# EAGLE board emonDCduo-ESP v1.2 (EAGLE 8.3.2)
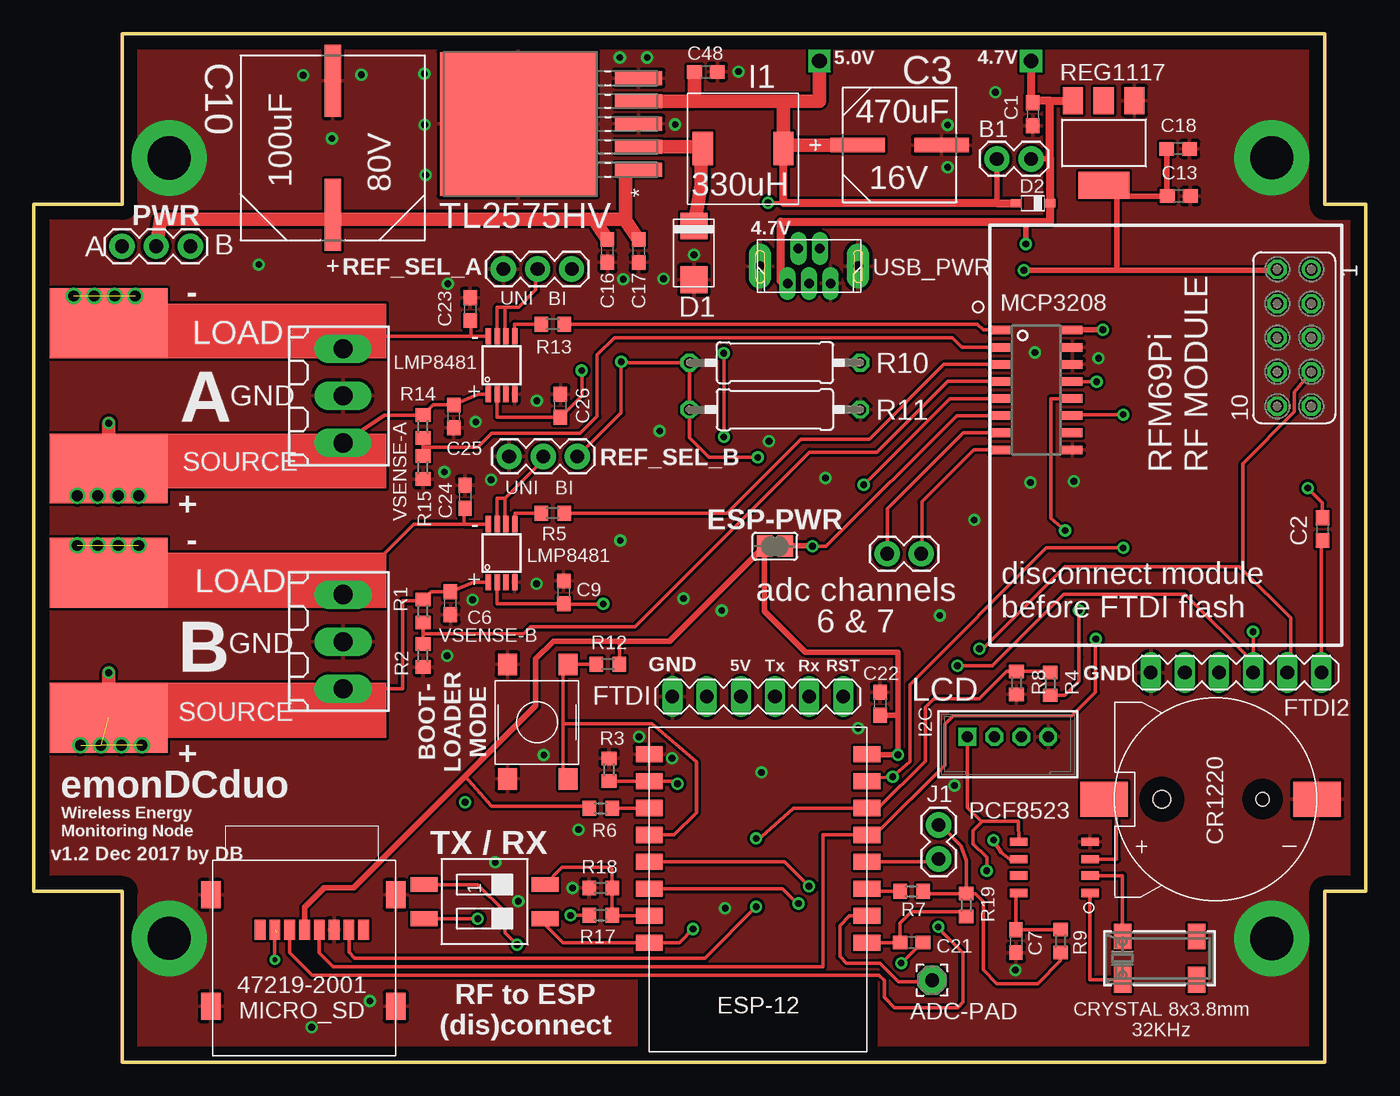
[diagram p0: board, top side]
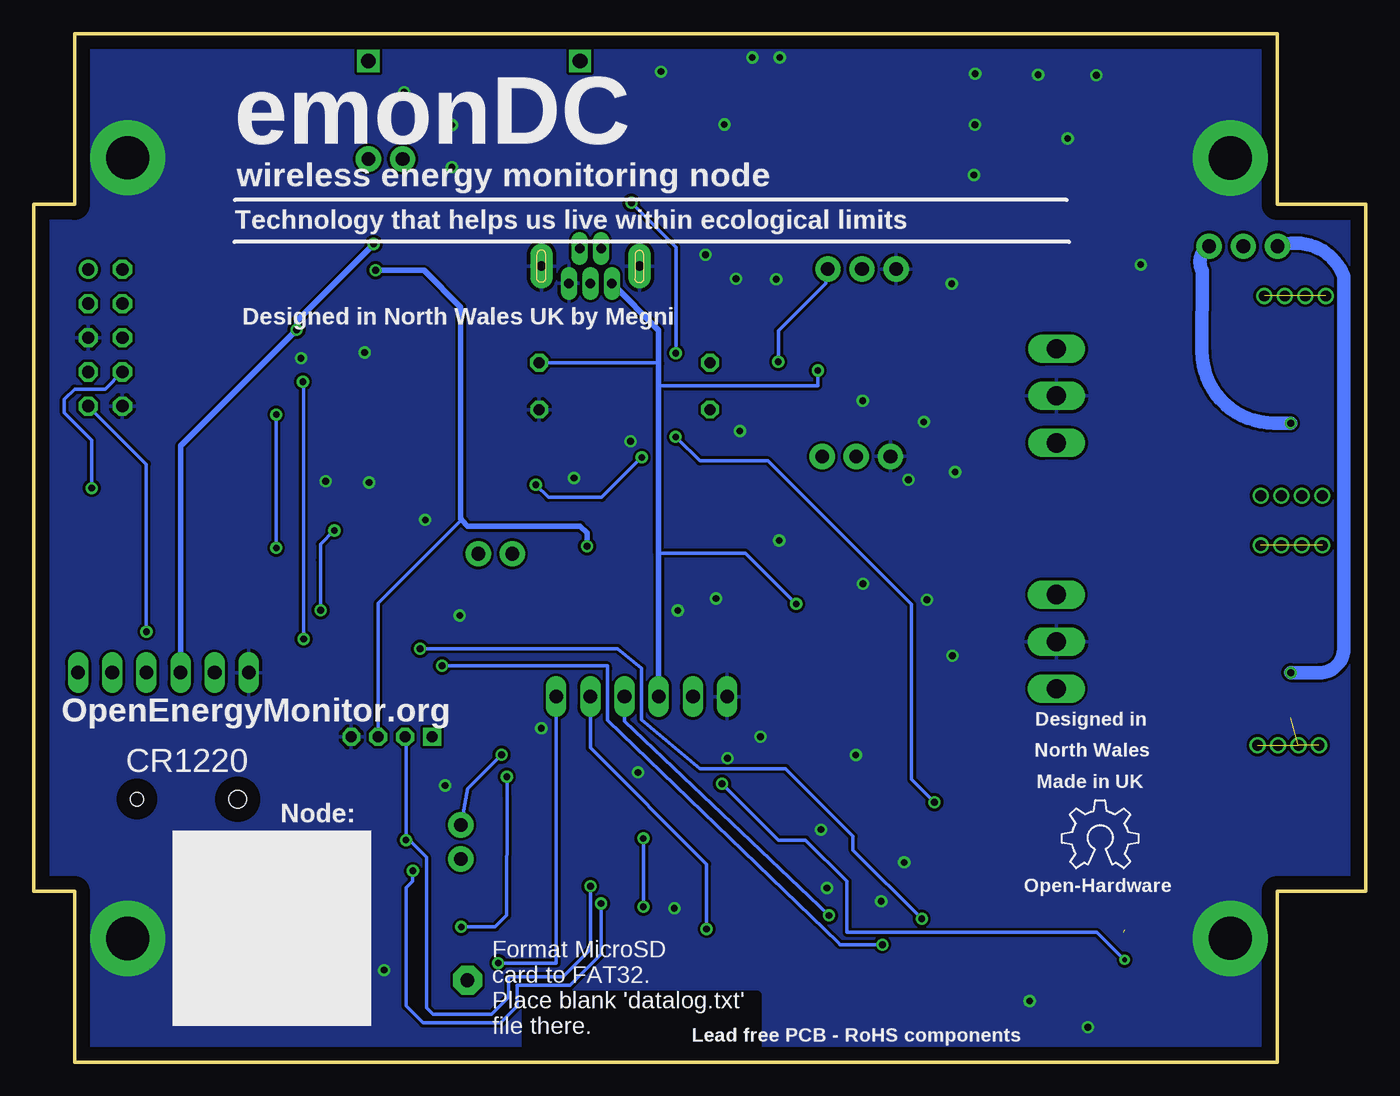
[diagram p1: board, bottom side, seen from below]

Size 99.06 x 76.45 mm. Coordinates in mm from the lower left corner, seen from the top.
Outline: 6.6,63.75 6.6,76.45 96.01,76.45 96.01,63.75 99.06,63.75 99.06,12.7 96.01,12.7 96.01,0 6.6,0 6.6,12.7 0,12.7 0,63.75 6.6,63.75
Copper layers (1*16): Top 0.035mm / dielectric 1.5mm / Bottom 0.035mm
Design rules "default *": minimum track width 10mil, minimum drill 19mil, track to track 8mil, track to pad 8mil, pad to pad 8mil, via to via 8mil, smd to smd 8mil, copper to edge 40mil, drill to drill 8mil, minimum pad ring 10mil, minimum via ring 8mil, stop-mask expansion 4mil, vias tented up to drill 0mil, thermal gap 10mil
Net classes: 2 thin_power: width 0.254 mm
tRestrict: area 45.2,1 to 62.5,6.1
bRestrict: area 45.2,1 to 62.5,5.1

## Footprints (pad centres in the part's own frame; a part is rotated, then mirrored left to right if it is on the bottom)
2,15/1,0 = drill 1.016 pad 2.159 octagon: 1 0,0
1X02 = drill 1.016 pad 1.88: 1 0,0; 2 2.54,0
C0603 = smd 1.1 x 1: 1 -0.85,0; 2 0.85,0
CAPAE830X1050N = smd 4.064 x 1.092: 1 -3.124,0; 2 3.124,0
CAPAE1350X1400N = smd 5.359 x 1.194: 1 -4.978,0; 2 4.978,0
CR1220SMD = smd 3.54 x 2.6: P+ 8.3,0; P- -7.55,0 | hole 1: -3.5,0 | hole 1.3: 4,0
DO-214 = smd 2 x 2: P$1 -2,0; P$2 2,0
SOD323_ST = smd 0.8 x 0.6: A 1.25,0; C -1.25,0
ESP8266-ESP12 = smd 2 x 1.2: 1 16.2,2; 2 16.2,4; 3 16.2,6; 4 16.2,8; 5 16.2,10; 6 16.2,12; 7 16.2,14; 8 16.2,16; 9 0,16; 10 0,14; 11 0,12; 12 0,10; 13 0,8; 14 0,6; 15 0,4; 16 0,2
SJ = smd 1.168 x 1.6: 1 -0.762,0; 2 0.762,0
MA06-1 = drill 1.016 long: 1 0,0; 2 2.54,0; 3 5.08,0; 4 7.62,0; 5 10.16,0; 6 12.7,0
FE05-2 = drill 0.914: 1 -5.08,1.27 | drill 0.914 octagon: 2 -5.08,-1.27; 3 -2.54,1.27; 4 -2.54,-1.27; 5 0,1.27; 6 0,-1.27; 7 2.54,1.27; 8 2.54,-1.27; 9 5.08,1.27; 10 5.08,-1.27
SRR0603-331KL = smd 1.5 x 2.5: P$1 -3,0; P$2 3,0
SWITCH_TACT_MULTICOMP = smd 1.6 x 1.4: P$1 -1.1,5.3; P$2 7.4,5.3; P$3 -1.1,0.8; P$4 7.4,0.8
SOIC16 = smd 0.635 x 1.524: 1 -4.445,-2.695; 2 -3.175,-2.695; 3 -1.905,-2.695; 4 -0.635,-2.695; 5 0.635,-2.695; 6 1.905,-2.695; 7 3.175,-2.695; 8 4.445,-2.695; 9 4.445,2.695; 10 3.175,2.695; 11 1.905,2.695; 12 0.635,2.695; 13 -0.635,2.695; 14 -1.905,2.695; 15 -3.175,2.695; 16 -4.445,2.695
5000751517_SD = drill 0.7 pad 1.016 long: D+ 0,-1.3; D- -0.8,1.3; GND1 1.6,-1.3; ID 0.8,1.3; VBUS -1.6,-1.3 | drill 0.7 pad 1.676 long: GND2 3.65,0; GND3 -3.65,0
B4B-PH-K = drill 0.813 square: 1 -3,0 | drill 0.813 octagon: 2 -1,0; 3 1,0; 4 3,0
SOIC_8 = smd 1.3 x 0.6: 1 -2.6,1.9; 2 -2.6,0.6; 3 -2.6,-0.6; 4 -2.6,-1.9; 5 2.7,-1.9; 6 2.7,-0.6; 7 2.7,0.6; 8 2.7,1.9
1X03 = drill 1.016 pad 1.88: 1 0,0; 2 2.54,0; 3 5.08,0
R0603 = smd 1 x 1.1: 1 -0.85,0; 2 0.85,0
0309/12 = drill 0.813 octagon: 1 -6.35,0; 2 6.35,0
SOT223 = smd 1.499 x 2.007: 1 -2.261,-3.15; 2 0.025,-3.15; 3 2.311,-3.15 | smd 3.81 x 2.007: 4 0,3.15
SMS-002 = smd 1.092 x 2.007: 1 -1.27,-4.496; 2 1.27,-4.496; 3 1.27,4.496; 4 -1.27,4.496
180-3 = drill 1.422 long: 1 -3.5,0; 2 0,0; 3 3.5,0
S-PDSO-G08 = smd 0.4 x 1.2: 1 -0.975,-2.157; 2 -0.325,-2.157; 3 0.325,-2.157; 4 0.975,-2.157; 5 0.975,2.157; 6 0.325,2.157; 7 -0.325,2.157; 8 -0.975,2.157
TO-263 = smd 1.041 x 3.505: 1 -3.404,-8.788; 2 -1.702,-8.788; 3 0,-8.788; 4 1.702,-8.788; 5 3.404,-8.788 | smd 10.668 x 11.659: 6 0,0.152
EBW_SERIES_15.2MM = smd 5.2 x 8.75: P$1 -5.4,0; P$2 5.4,0
47219-2001_MICROSD = smd 1.45 x 2: P$1 0,0; P$2 13.75,0; P$3 0,8.3; P$4 13.75,8.3 | smd 0.8 x 1.5: PIN1 10.08,2.6; PIN2 8.98,2.6; PIN3 7.88,2.6; PIN4 6.78,2.6; PIN5 5.68,2.6; PIN6 4.58,2.6; PIN7 3.48,2.6; PIN8 2.38,2.6
CRYSTAL_8X3.8 = smd 1.3 x 1.9: P$1 -2.75,-1.6; P$2 2.75,-1.6; P$3 2.75,1.6; P$4 -2.75,1.6

## Placement (x,y rotation side)
ADC-PAD  [2,15/1,0]  66.8,6.1 0 top
B1  [1X02]  71.63,67.14 0 top
C1  10uF TANT  [C0603]  74.3,70.46 270 top
C2  100nF  [C0603]  95.83,39.63 270 top
C3  470uF 16V  [CAPAE830X1050N]  64.39,68.17 0 top
C6  0.1uF 100V  [C0603]  30.99,34.11 270 top
C7  10uF  [C0603]  73.04,9 270 top
C9  100nF  [C0603]  39.42,34.93 90 top
C10  100uF 80V  [CAPAE1350X1400N]  22.25,67.96 90 top
C13  100nF  [C0603]  85.15,64.38 0 top
C16  0.1uF 100V  [C0603]  42.66,60.3 270 top
C17  0.1uF 100V  [C0603]  44.99,60.3 270 top
C18  10uF TANT  [C0603]  85.1,67.89 0 top
C21  100nF  [C0603]  65.28,8.89 0 top
C22  100nF  [C0603]  62.94,26.64 270 top
C23  0.1uF 100V  [C0603]  32.46,55.98 270 top
C24  0.1uF 100V  [C0603]  32.08,42.04 270 top
C25  0.1uF 100V  [C0603]  31.24,48.01 270 top
C26  100nF  [C0603]  39.17,48.8 90 top
C48  100nF  [C0603]  49.99,73.61 0 top
CR1220  CR1220SMD  [CR1220SMD]  87.88,19.56 180 top
D1  MBRA130LT3G  [DO-214]  49.09,60.16 270 top
D2  BAT60AE6327HTSA1  [SOD323_ST]  74.31,63.85 180 top
ESP-12  ESP8266_ESP-12  [ESP8266-ESP12]  61.98,24.89 180 top
ESP-PWR  [SJ]  55.12,38.35 0 top
FTDI1  FTDI  [MA06-1]  60.2,27.18 180 top
FTDI2  FTDI  [MA06-1]  95.76,28.96 180 top
GPIO_1  [FE05-2]  93.73,53.85 270 top
I1  330uH  [SRR0603-331KL]  52.76,67.91 0 top
IO1  [1X02]  67.29,15.1 90 top
J5  455-1750-1-ND  [1X02]  66,37.79 180 top
LOGO1  OSHW_LOGO_6MILX0200-NT  [OSHW_6X200_NOTEXT]  22.6,14.4 0 bottom
MC2  MC32882  [SWITCH_TACT_MULTICOMP]  40.53,22.17 90 top
MCP3208  MCP3208-BI/SL  [SOIC16]  74.54,49.96 270 top
MINI_USB-B  5000751517_SD  [5000751517_SD]  57.66,59.18 0 top
P1  B4B-PH-K  [B4B-PH-K]  72.44,24.18 0 top
PCF8523  PCF8523_RTC  [SOIC_8]  75.95,14.48 180 top
PWR  455-1750-1-ND  [1X03]  6.57,60.64 0 top
R1  100K 75V  [R0603]  28.96,33.53 90 top
R2  5.6K  [R0603]  28.96,30.23 90 top
R3  10K  [R0603]  42.79,21.74 90 top
R4  1K  [R0603]  75.57,28.13 270 top
R5  1K  [R0603]  38.6,40.81 0 top
R6  10K  [R0603]  42.16,18.87 180 top
R7  10K  [R0603]  65.28,12.7 0 top
R8  2K  [R0603]  73.08,28.19 90 top
R9  1K  [R0603]  76.36,9.01 270 top
R10  10K  [0309/12]  55.12,52 0 top
R11  3.16K  [0309/12]  55.12,48.51 180 top
R12  10K  [R0603]  42.7,29.59 0 top
R13  1K  [R0603]  38.61,54.86 0 top
R14  100K 75V  [R0603]  28.96,47.24 90 top
R15  5.6K  [R0603]  28.96,44.2 90 top
R17  5.6K  [R0603]  42.16,10.92 0 top
R18  10K  [R0603]  42.16,12.95 180 top
R19  10K  [R0603]  69.34,11.68 90 top
REF_SEL_A  455-1750-1-ND  [1X03]  34.92,58.95 0 top
REF_SEL_B  455-1750-1-ND  [1X03]  35.35,45.03 0 top
REG1117  REG1117-3.3V  [SOT223]  79.58,68.33 180 top
S1  SWS002  [SMS-002]  33.53,11.94 270 top
SCREW1  [180-3]  23,49.53 270 top
SCREW2  [180-3]  23.01,31.26 270 top
SHUNTMON-A  LMP8481  [S-PDSO-G08]  34.8,51.82 0 top
SHUNTMON-B  LMP8481  [S-PDSO-G08]  34.8,37.85 0 top
TL2575HV  TL2575HV-5V  [TO-263]  36.19,69.74 90 top
U$1  EBW_SERIES_15.2MM  [EBW_SERIES_15.2MM]  5.59,30.99 90 top
U$3  EBW_SERIES_15.2MM  [EBW_SERIES_15.2MM]  5.59,49.53 90 top
U$4  47219-2001_MICROSD  [47219-2001_MICROSD]  26.92,12.45 180 top
Y1  32Khz  [CRYSTAL_8X3.8]  83.71,7.73 0 top

## Library data of the parts
ADC-PAD = wirepad
B1 IO1 = SparkFun
C1 C18 = rcl; PARTNO: TMCJ0J106MTRF
C2 C7 C13 C16 C17 C21 C22 C48 R3 R5-R7 R9-R13 R17-R19 = rcl
C3 = Panasonic-EEEFK_EEEFP; MPN: EEE-FK1C471P; OC_FARNELL: 9695710; OC_NEWARK: 96K9385; PACKAGE: CASE-F; SUPPLIER: PANASONIC; TOLERANCE: ±20 %; VOLTAGERATING: 16V
C6 C9 C23-C26 = rcl; MPN: C1608X7S2A104K080AB
C10 = Panasonic-EEE-EEV-EEF-ECQ; MPN: EEVFK1K101Q; OC_FARNELL: 9696113; OC_NEWARK: 96K9484; SUPPLIER: PANASONIC; TOLERANCE: ±20 %; VOLTAGERATING: 80V
CR1220 PCF8523 = IotaWatt_parts
D1 = CASE 403D Diode; MF: ON SEMICONDUCTOR; MPN: MBRA130LT3G; OC_FARNELL: 9555978
D2 = diode; MPN: BAT60AE6327HTSA1
ESP-12 = ESP8266-ESP12
ESP-PWR = jumper
FTDI1 FTDI2 = JeeLabs
GPIO_1 = con-lsta; OC_FARNELL: unknown; OC_NEWARK: unknown
I1 = SRR0603-331KL; INDUCTANCE: 330uH; MF: BOURNS; MPN: SRR0603-331KL; OC_FARNELL: 2333890
J5 = SparkFun-Connectors
LOGO1 = ohw-logo; OC_FARNELL: unknown
MC2 = multicomp tact switch
MCP3208 = MCP3208
MINI_USB-B = 5000751517_sd
P1 = jst-ph
PWR = SparkFun-Connectors; PROD_ID: XXX-00000
R1 R14 = rcl; MPN: MCWR06X1003FTL
R2 R4 R8 R15 = rcl; MPN: MCWR06X5901FTL
REF_SEL_A REF_SEL_B = SparkFun-Connectors; MF: MULTICOMP; MPN: 2212S-02SG-85; OC_FARNELL: 1593458; PROD_ID: XXX-00000
REG1117 = burr-brown; MF: TEXAS INSTRUMENTS; MPN: REG1117; OC_FARNELL: 1097566; OC_NEWARK: 14P6981
S1 = smd-special
SCREW1 SCREW2 = con-weidmueller-sl35; OC_FARNELL: unknown; OC_NEWARK: unknown
SHUNTMON-A = lmp8481b; MF: TEXAS INSTRUMENTS; MPN: LMP8481MME-S/NOPB; OC_FARNELL: 2322044
SHUNTMON-B = lmp8481b; DIGIKEY_PART: 296-37196-1-ND; MF: TEXAS INSTRUMENTS; MPN: LMP8481MME-H/NOPB; OC_FARNELL: 2322044
TL2575HV = TL2575HV; MF: TEXAS INSTRUMENTS; MPN: LM2575HVS-15/NOPB; OC_FARNELL: 2492609
U$1 U$3 = EBW series shunt
U$4 = MOLEX 47219-2001
Y1 = microbuilder

## Nets
3.3V: C13.1 C18.1 ESP-PWR.2 GPIO_1.2 MCP3208.6 P1.3 REG1117.2 REG1117.4
3.3V-ESP: C22.2 ESP-12.16 ESP-PWR.1 IO1.2 R6.2 R7.2 R9.2 R12.2 R19.2 U$4.PIN4
4.7V [power]: B1.2 C1.1 C9.1 C26.1 D2.C FTDI1.4 FTDI2.4 MCP3208.16 MINI_USB-B.VBUS R10.2 REG1117.3 SHUNTMON-A.2 SHUNTMON-B.2
+5V: B1.1 C3.1 C48.1 D2.A I1.P$2 TL2575HV.4
_RESET: C2.1 GPIO_1.8
ADC: ADC-PAD.1 ESP-12.10
ADCSHUNT-A: MCP3208.1 R13.2
ADCSHUNT-B: MCP3208.3 R5.2
CH6: J5.2 MCP3208.7
CH7: J5.1 MCP3208.8
CH_PD: ESP-12.11 R7.1
D0/RX: FTDI2.2 GPIO_1.7 S1.2
D1/TX: FTDI2.3 GPIO_1.9 S1.1
ESPRX: ESP-12.7 R17.2 R18.1 S1.4
ESPTX: ESP-12.8 FTDI1.2 S1.3
GND [thin_power]: C1.2 C3.2 C6.2 C7.2 C9.2 C10.2 C13.2 C16.2 C17.2 C18.2 C22.1 C23.1 C24.1 C25.2 C26.2 C48.2 CR1220.P- D1.P$2 ESP-12.1 FTDI1.6 FTDI2.6 GPIO_1.5 GPIO_1.10 MC2.P$1 MC2.P$2 MCP3208.9 MCP3208.14 MCP3208.15 MINI_USB-B.GND1 MINI_USB-B.GND2 MINI_USB-B.GND3 P1.4 PCF8523.4 R2.1 R3.2 R8.1 R11.1 R15.1 R18.2 REF_SEL_A.1 REF_SEL_B.1 REG1117.1 SCREW1.2 SCREW2.2 SHUNTMON-A.4 SHUNTMON-B.4 TL2575HV.3 TL2575HV.5 TL2575HV.6 U$4.P$1 U$4.P$2 U$4.P$3 U$4.P$4 U$4.PIN6
GPIO0: ESP-12.4 MC2.P$3 MC2.P$4 R12.1
GPIO2: ESP-12.3 R6.1
GPIO4: MCP3208.10
GPIO12: ESP-12.14 R4.1 R8.2 U$4.PIN7
GPIO12A: MCP3208.12 R4.2
GPIO13: ESP-12.15 MCP3208.11 U$4.PIN3
GPIO14: ESP-12.13 MCP3208.13 U$4.PIN5
GPIO15 [thin_power]: ESP-12.2 R3.1 U$4.PIN2
GPIO16: ESP-12.12 IO1.1
IND: D1.P$1 I1.P$1 TL2575HV.2
LOAD-NEG-A: C23.2 SCREW1.1 SHUNTMON-A.8 U$3.P$2
LOAD-NEG-B: C24.2 SCREW2.1 SHUNTMON-B.8 U$1.P$2
N$4: R13.1 SHUNTMON-A.5
N$6: R5.1 SHUNTMON-B.5
N$7: U$4.PIN1
N$10: C7.1 PCF8523.8 R9.1
N$20: FTDI2.5
N$30: C21.2 FTDI1.1
N$32: U$4.PIN8
N$36: FTDI1.3 R17.1
N$43: CR1220.P+ PCF8523.3
N$44: PCF8523.2 Y1.P$4
N$45: PCF8523.1 Y1.P$1
N$301: C2.2 FTDI2.1
PWR_IN: C10.1 C16.1 C17.1 PWR.2 TL2575HV.1
REF_A_INPUT: REF_SEL_A.2 SHUNTMON-A.6 SHUNTMON-A.7
REF_B_INPUT [thin_power]: REF_SEL_B.2 SHUNTMON-B.6 SHUNTMON-B.7
REF_INPUT: MCP3208.5 R10.1 R11.2 REF_SEL_A.3 REF_SEL_B.3
RESTESP: C21.1 ESP-12.9 R19.1
SCL: ESP-12.5 P1.2 PCF8523.6
SDA: ESP-12.6 P1.1 PCF8523.5
SOURCE-POS-A: C25.1 PWR.3 R14.2 SCREW1.3 SHUNTMON-A.1 U$3.P$1
SOURCE-POS-B: C6.1 PWR.1 R1.2 SCREW2.3 SHUNTMON-B.1 U$1.P$1
VSENSEA: MCP3208.2 R14.1 R15.2
VSENSEB: MCP3208.4 R1.1 R2.2

## Tracks (layer width: path | path; a pad name or v marks a point on that pad's centre or on a via)
3.3V  (via drill 0.5)
  Top 0.254: 55.94,38.39 ESP-PWR.2 | 92.46,58.86 GPIO_1.2 | MCP3208.6 68.63,48.06 58.93,38.35 v57.91,38.35
  Top 0.406: REG1117.2 79.54,71.48 | C18.1 84.25,64.44 C13.1 80.55,64.38 | 79.54,65.13 REG1117.4 79.58,64.38 80.55,64.38 | v57.91,38.35 57.88,38.39 55.94,38.39 | v73.63,58.86 80.55,58.86 | 80.55,58.86 92.46,58.86 | 80.55,58.86 80.55,64.38
  Bottom 0.254: P1.3 73.44,34.13 67.25,40.32
  Bottom 0.406: v73.63,58.86 70.04,58.86 67.31,56.13 67.31,40.39 67.25,40.32 66.78,39.85 58.42,39.85 57.91,39.34 v57.91,38.35
3.3V-ESP  (via drill 0.5)
  Top 0.254: R7.2 66.13,12.53 R19.2 | R6.2 40.89,19.04 34.05,19.04 32.09,21.25 | R19.2 69.34,14.99 68.96,16.11 67.42,17.64 IO1.2 | R19.2 70.02,12.53 70.61,11.94 70.61,6.86 71.63,5.84 74.68,5.84 76.36,7.53 R9.2 | R12.2 43.55,31.28 43.75,31.28
  Top 0.406: 64.26,25.91 64.26,30.48 57.4,30.48 54.36,33.53 ESP-PWR.1 47.29,31.28 43.75,31.28 38.65,31.28 37.34,29.97 37.34,26.49 32.09,21.25 23.8,12.95 21.59,12.95 20.14,11.51 U$4.PIN4 | 64.26,25.91 v64.26,22.86 62.01,22.86 ESP-12.16 | C22.2 64.15,25.8 64.26,25.91
  Bottom 0.254: v64.26,22.86 66.8,20.32 IO1.2
4.7V  (via drill 0.5, 1.1)
  Top 0.254: SHUNTMON-A.2 34.47,47.95 C26.1 40.76,49.54 40.76,51.36 40.75,51.36 v40.75,51.41 | SHUNTMON-B.2 34.47,34.08 C9.1 39.46,34.04 42.42,34.04 42.39,34.07 v42.36,34.07
  Top 0.406: D2.C 75.74,64.1 | 74.17,71.31 C1.1 74.3,71.48 | 75.56,62.48 73.79,62.48 v73.79,60.81 | v79.5,54.44 77.27,54.44 MCP3208.16 | MINI_USB-B.VBUS 55.86,58.08 55.56,58.08 | B1.2 75.4,67.14 75.56,67.31
  Top 0.61: v74.17,74.42 74.17,71.31 | 75.56,71.48 75.56,67.31 D2.C 75.56,62.48 55.56,62.48 55.56,58.08 | 75.56,71.48 REG1117.3 | 75.56,71.48 74.3,71.48
  Bottom 0.254: 40.85,51.31 v40.75,51.41 40.75,50.29 52.58,50.29 52.58,51.94 52.58,52 R10.2 | v42.36,34.07 46.14,37.85 52.58,37.85
  Bottom 0.406: FTDI1.4 52.58,37.85 52.58,51.94 52.58,54.4 MINI_USB-B.VBUS | FTDI2.4 88.14,45.81 v79.5,54.44 79.5,55.09 v73.79,60.81
+5V  (via drill 0.5, 1.1)
  Top 0.254: v54.61,63.88 55.72,63.88 55.76,63.85 | 32.07,19.16 v32.08,19.33 | v51.32,46.48 51.32,52.69 v51.31,52.7
  Top 0.406: B1.1 71.63,63.85
  Top 0.61: D2.A 71.63,63.85 55.76,63.85 I1.P$2
  Top 1.016: TL2575HV.4 49.14,71.44 | 49.14,71.44 C48.1 | 55.76,71.44 I1.P$2 55.5,68.17 C3.1 | 55.76,71.44 49.14,71.44 | v58.42,74.42 58.42,71.44 55.76,71.44
  Bottom 0.254: v51.32,46.48 51.18,46.36 49.53,44.7 44.45,44.7 33.78,34.04 33.78,21.03 v32.08,19.33 | v51.31,52.7 51.31,60.58 v54.61,63.88
_RESET  (via drill 0.5)
  Top 0.254: C2.1 95.83,41.58 v94.74,42.67
  Bottom 0.254: v94.74,42.67 94.74,46.23 96.77,48.26 96.77,49.28 96.01,50.04 93.73,50.04 GPIO_1.8
ADC
  Top 0.254: ESP-12.10 60.68,10.89 59.94,10.16 59.94,7.87 60.45,7.37 62.93,7.37 64.3,5.99 66.7,5.99 ADC-PAD.1
ADCSHUNT-A
  Top 0.254: R13.2 70.18,54.86 70.6,54.44 71.81,54.44 MCP3208.1
ADCSHUNT-B
  Top 0.254: MCP3208.3 71.82,51.88 67.69,51.88 62.14,46.32 57.05,46.32 51.54,40.81 R5.2 39.43,40.83
CH6
  Top 0.254: MCP3208.7 69.14,46.79 63.5,41.15 63.5,37.39 J5.2
CH7
  Top 0.254: MCP3208.8 69.9,45.52 66.04,41.66 66.04,37.39 J5.1
CH_PD
  Top 0.254: ESP-12.11 61.98,12.7 R7.1
D0/RX  (via drill 0.5)
  Top 0.254: S1.2 v33.02,10.67 | v70.32,30.73 70.57,30.73 76.67,36.83 89.66,36.83 89.92,36.58 | 89.92,36.58 93.47,33.02 93.47,29.21 FTDI2.2 | GPIO_1.7 93.75,49.81 93.75,48.34 89.92,44.5 89.92,36.58
  Bottom 0.254: v33.02,10.67 38.13,15.77 38.13,16.79 43.16,21.82 49.52,21.82 53.86,25.46 53.86,29.29 55.63,30.73 v70.32,30.73
D1/TX  (via drill 0.5)
  Top 0.254: v90.68,32 FTDI2.3 90.68,29.72 85.6,34.8 76.62,34.8 71.28,29.46 v68.69,29.46 | v35.95,8.74 35.05,9.64 35.05,11.18 33.02,13.21 S1.1
  Bottom 0.254: v68.69,29.46 56.39,29.46 56.38,29.26 56.38,25.43 39.22,8.87 39.1,8.74 v35.95,8.74 | v90.68,32 90.68,44.45 GPIO_1.9
ESPRX
  Top 0.254: ESP-12.7 42.79,10.89 R17.2 R18.1 43.01,14.39 42.93,14.48 39.29,14.48 S1.4
ESPTX  (via drill 0.5)
  Top 0.254: S1.3 38.02,10.24 39.37,8.89 ESP-12.8 48.01,8.89 v49.02,9.91
  Bottom 0.254: v49.02,9.91 49.02,14.73 57.66,23.37 FTDI1.2
GND  (via drill 0.5, 3.2 pad 5.59)
  Top 0.254: ESP-12.1 46.06,22.61
  other vias: 10.08,67.21 92.07,67.23 52.4,73.63 10.08,9.2 92.07,9.2 32.65,34.38 16.74,59.28 30.55,43.87 37.41,49.17 71.51,72.1 32.87,47.6 37.39,35.57 47.47,22.6 51.42,11.44 43.84,58.2 67.97,66.53 47.7,69.7 29.07,69.69 20.04,73.36 24.38,73.4 30.74,30.22 34.01,43.3 20.66,2.6 49.09,60.02 45.02,24.2 61.31,24.82 30.81,57.87 37.93,22.83 25.01,4.55 46.83,58.24 67.97,69.67 29.14,65.95 29.06,73.48 43.59,74.69 45.62,74.69 22.18,68.66 43.63,38.79 48.33,34.47 51.17,33.58 67.38,33.2 54.12,21.54 74.11,43.09 79.18,52.33 74.44,52.76 77.35,43.18 54.68,46.15 72.99,6.85 46.55,46.91 58.88,43.42 40.08,12.95 40.52,17.29 36.04,11.96 34.32,14.85 69.94,40.31 68.47,20.57
  pour Bottom (isolate 0.127): 6.86,76.2 6.86,63.5 0.25,63.5 0.25,12.95 6.86,12.95 6.86,0.25 95.76,0.25 95.76,12.95 98.81,12.95 98.81,63.5 95.76,63.5 95.76,76.2
  pour Top (isolate 0.127): 6.86,76.2 6.86,63.5 0.25,63.5 0.25,12.95 6.86,12.95 6.86,0.25 95.76,0.25 95.76,12.95 98.81,12.95 98.81,63.5 95.76,63.5 95.76,76.2
GPIO0
  Top 0.254: ESP-12.4 47.63,16.89 49.28,18.54 49.28,22.35 45.97,25.15 39.37,25.15 | 39.37,25.15 39.37,29.21 39.73,29.21 MC2.P$4 R12.1 | 39.37,25.15 39.37,21.59 39.73,21.59 MC2.P$3
GPIO2
  Top 0.254: 42.93,18.78 R6.1 45.76,18.87 ESP-12.3
GPIO12  (via drill 0.5)
  Top 0.254: 53.78,16.45 56.48,18.89 ESP-12.14 61.98,18.86 62.77,18.86 66.29,22.38 66.29,26.37 66.95,27.02 70.33,27.02 72.35,29.04 R8.2 75.57,29.04 R4.1 | 53.78,16.45 53.59,16.51 | v53.72,11.56 49.91,7.75 23.88,7.75 23.44,8.18 U$4.PIN7 | v53.72,16.64 53.85,16.64 53.78,16.45
  Bottom 0.254: v53.72,16.64 v53.72,11.56
GPIO12A  (via drill 0.5)
  Top 0.254: 77.22,49.34 MCP3208.12 75.64,49.33 75.64,40.45 76.69,39.52 v76.7,39.52 | v77.72,33.59 77.72,30.14 77.72,30.13 77.72,28.32 76.68,27.28 R4.2
  Bottom 0.254: v76.7,39.52 77.72,38.5 77.72,37.34 v77.72,33.59
GPIO13  (via drill 0.48, 0.5)
  Top 0.254: ESP-12.15 61.98,21.08 v63.87,21.22 65.15,22.35 65.15,28.07 75.31,38.23 v81.03,38.23 | v81.03,48.13 77.72,48.13 MCP3208.11 | v67.26,10.06 67.26,9.95 69.09,8.13 69.09,4.45 68.71,4.06 64.01,4.06 63.25,4.83 63.25,6.1 62.87,6.48 20.7,6.48 19.04,8.13 U$4.PIN3
  Bottom 0.254: v63.87,21.22 63.87,19.81 63.88,10.92 64.75,10.06 v67.26,10.06 | v81.03,38.23 v81.03,48.13
GPIO14  (via drill 0.5)
  Top 0.254: ESP-12.13 58.67,16.89 58.67,7.11 22.26,7.11 21.24,8.13 U$4.PIN5 | ESP-12.13 | ESP-12.13 62.57,16.89 67.77,22.08 67.77,25.14 68.38,25.76 77.19,25.76 78.95,27.52 78.95,31.43 v78.98,31.46 | v79.04,50.58 77.26,50.58 MCP3208.13
  Bottom 0.254: v78.98,31.46 78.98,50.52 v79.04,50.58
GPIO15  (via drill 0.35, 0.5)  (1 unrouted)
  Top 0.254: ESP-12.2 R3.1 47.88,20.89 v47.88,20.7 | 18.03,9.65 18.09,9.65 | v17.94,7.62 U$4.PIN2
  Bottom 0.254: v47.88,20.7 43.69,16.51 41.66,16.51 38.58,13.44 38.58,9.65 20,9.65 17.95,7.6 v17.94,7.62
GPIO16
  Top 0.254: IO1.1 66.71,14.89 ESP-12.12
IND
  Top 1.016: TL2575HV.2 49.63,68.04 | 49.63,68.04 I1.P$1 | 49.63,68.04 49.63,65.1 D1.P$1
LOAD-NEG-A
  Top 0.254: 32.51,53.97 23.94,53.97 SCREW1.1 22.34,53.69 7.02,53.69 | 32.51,53.97 SHUNTMON-A.8 | C23.2 32.51,54.83 32.51,53.97
  Top 2.54: 7.02,53.69 U$3.P$2
LOAD-NEG-B
  Top 0.152: U$1.P$2 5.59,37.85 5.6,37.86 | 8.69,38.35 8.69,38.05 7.03,36.39 U$1.P$2 | U$1.P$2 5.59,37.59 5.39,37.79 | U$1.P$2 5.91,36.39 7.25,37.73
  Top 0.254: 32,40 28.25,40 SCREW2.1 21.38,36.39 U$1.P$2 | 32,40 SHUNTMON-B.8 | C24.2 32,41.11 32,40
N$4
  Top 0.254: SHUNTMON-A.5 35.77,54.86 R13.1
N$6
  Top 0.254: SHUNTMON-B.5 35.81,40.81 R5.1
N$10
  Top 0.254: R9.1 73.05,9.86 C7.1 73.04,12.53 PCF8523.8
N$30  (via drill 0.5)
  Top 0.254: v64.52,7.37 66.04,8.89 C21.2
  Bottom 0.254: FTDI1.1 60.2,7.37 v64.52,7.37
N$36  (via drill 0.5)
  Top 0.254: R17.1 v39.92,10.91
  Bottom 0.254: v39.92,10.91 55.12,25.36 FTDI1.3
N$43
  Top 0.254: PCF8523.3 80.52,15.08 80.52,19.3 79.58,19.3 CR1220.P+
N$44
  Top 0.254: PCF8523.2 80.96,13.88 Y1.P$4
N$45
  Top 0.254: PCF8523.1 78.55,6.13 Y1.P$1
N$301
  Top 0.254: FTDI2.1 95.76,38.35 95.83,38.43 C2.2
PWR_IN
  Top 1.016: 44.27,66.33 TL2575HV.1 44.01,66.33 44.01,62.66 43.94,62.66 | PWR.2 9.46,62.66 21.93,62.66 | 43.94,62.66 42.29,62.66 41.9,62.27 | C16.1 41.9,62.27 | C17.1 43.97,62.63 43.94,62.66 | 21.93,62.66 C10.1 | 41.9,62.27 41.9,62.66 21.93,62.66
REF_A_INPUT
  Top 0.254: 35.05,56.13 35.05,54.04 SHUNTMON-A.6 | SHUNTMON-A.7 34.47,56.13 35.05,56.13 | 35.05,56.13 36.07,56.13 37.34,57.4 37.34,58.83 REF_SEL_A.2
REF_B_INPUT
  Top 0.254: REF_SEL_B.2 37.93,44.79 35.05,41.91 | 35.05,41.91 35.05,40.07 SHUNTMON-B.6 | SHUNTMON-B.7 34.47,41.91 35.05,41.91
REF_INPUT  (via drill 0.5)
  Top 0.254: v43.69,52.07 43.69,48.26 40.46,45.03 REF_SEL_B.3 | 43.69,52.32 v43.69,52.07 | v43.69,52.07 44.01,52.07 44.01,52 R10.1 R11.2 48.77,46.4 50.21,44.96 v53.85,44.96 | MCP3208.5 68.12,49.33 v61.72,42.93
  Bottom 0.254: v43.69,52.07 43.69,54.36 40.13,57.91 40.13,58.83 REF_SEL_A.3 | v61.72,42.93 60.78,41.99 56.82,41.99 v53.85,44.96
RESTESP
  Top 0.254: ESP-12.9 C21.1 64.43,10.33 65.28,11.18 69,11.18 R19.1
SCL  (via drill 0.5)
  Top 0.254: ESP-12.5 55.85,14.89 v57.66,13.08 | v71.37,16.51 71.94,15.57 72.58,15.08 PCF8523.6
  Bottom 0.254: v57.66,13.08 57.66,8.38 59.69,6.35 63.75,6.35 63.75,4.83 65.02,3.56 69.34,3.56 69.85,4.06 69.85,15.24 71.12,16.51 v71.37,16.51 71.37,24.12 P1.2
SDA  (via drill 0.5)
  Top 0.254: ESP-12.6 55.69,12.89 56.64,11.94 56.77,11.9 v56.87,11.8 | v70.87,14.22 70.87,15.24 69.85,16.26 69.85,17.21 70.51,17.86 | 70.51,17.86 70.55,17.91 73.24,17.91 PCF8523.5 | P1.1 69.44,18.93 70.51,17.86
  Bottom 0.254: v56.87,11.8 56.87,8.03 59.18,5.71 63.12,5.71 63.12,4.15 64.35,2.92 70.1,2.92 71.37,4.19 71.37,12.95 70.87,13.46 v70.87,14.22
SOURCE-NEG-A  (via drill 0.8)  (3 unrouted)
  other vias: 7.55,56.96 6.03,56.96 4.51,56.96 2.98,56.96
SOURCE-NEG-B  (via drill 0.8)  (3 unrouted)
  other vias: 7.81,38.42 6.28,38.42 4.76,38.42 3.24,38.42
SOURCE-POS-A  (via drill 0.5, 0.8)
  Top 0.152: U$3.P$1 5.59,42.93 v4.76,42.1 | U$3.P$1 5.59,42.8 v6.28,42.1 | U$3.P$1 5.78,44.13 v7.81,42.1 | U$3.P$1 5.27,44.13 v3.24,42.1
  Top 0.254: SHUNTMON-A.1 33.06,49.66 C25.1 29.72,48.86 R14.2 26.08,48.09 SCREW1.3 21.1,44.13 U$3.P$1
  Top 1.016: U$3.P$1 v5.59,47.5
  Bottom 1.016: PWR.3 arc-90 12.17,58.84 12.19,52.83 arc-90 6.86,47.5 v5.59,47.5
SOURCE-POS-B  (via drill 0.5, 0.8)  (4 unrouted)
  Top 0.254: SHUNTMON-B.1 32.73,35.69 C6.1 29.54,34.96 R1.2 28.96,34.29 27.43,34.29 27.43,27.76 SCREW2.3 20.83,25.59 U$1.P$1
  Top 1.016: U$1.P$1 v5.59,28.96
  Bottom 1.016: PWR.1 arc90 1.65,58.42 1.65,30.73 arc90 3.43,28.96 v5.59,28.96
  other vias: 8.06,23.56 6.54,23.56 5.01,23.56 3.49,23.56
VSENSEA
  Top 0.254: 28.96,44.96 R15.2 28.96,45.72 | R14.1 28.96,45.72 | MCP3208.2 69.03,53.14 68.33,53.85 43.18,53.85 41.91,52.58 41.91,48.01 40.64,46.74 34.04,46.74 33.02,45.72 28.96,45.72
VSENSEB
  Top 0.254: MCP3208.4 71.82,50.61 67.98,50.61 62.71,45.34 57.69,45.34 44.74,32.38 36.96,32.38 36.42,31.84 28.96,31.84 28.96,31.82 | 28.96,31.82 R1.1 | 28.96,31.82 R2.2
(copper drawn outside any net)
  shapes: Top area x4

## Text on the board
tPlace: VSENSE-A | VSENSE-B | MicroSD
bPlace: emonDC | wireless energy monitoring node | Technology that helps us live within ecological limits | Designed in North Wales UK by Megni | Designed in | OpenEnergyMonitor.org | North Wales | Made in UK | Node: | Open-Hardware | Format MicroSD / card to FAT32. / Place blank 'datalog.txt' / file there. | Lead free PCB - RoHS components
tNames: I1 | 470uF | 100uF | 16V | 80V | 330uH | A | B | USB_PWR | - | UNI | BI | D1 | LOAD | LMP8481 | A | GND | SOURCE | UNI | BI | + | - | LMP8481 | adc channels / 6 & 7 | LOAD | disconnect module / before FTDI flash | B | GND | LCD | SOURCE | BOOT- / LOADER / MODE | I2C | + | J1 | TX / RX | RF to ESP / (dis)connect | CRYSTAL 8x3.8mm / 32KHz
tSilk: 4.7V | 5.0V | 4.7V | RFM69Pi / RF MODULE | GND | 5V | Tx | Rx | RST | GND | emonDCduo | Wireless Energy / Monitoring Node | v1.2 Dec 2017 by DB
_tsilk: Designed in | North Wales | Made in UK
_bsilk: SMT V0.6 rev3 | emonTx | wireless energy monitoring node | SMT V0.6 rev3 | emonTx | SMT V0.6 rev3 | emonTx | Technology that helps us live within ecological limits | wireless energy monitoring node | wireless energy monitoring node | Designed in North Wales UK by Glyn Hudson & Trystan Lea | Technology that helps us live within ecological limits | Technology that helps us live within ecological limits | Designed in North Wales UK by Glyn Hudson & Trystan Lea | 165mm ant | 433Mhz | Designed in North Wales UK by Glyn Hudson & Trystan Lea | 165mm ant | 165mm ant | 433Mhz | 433Mhz | 868Mhz | 82mm ant | 82mm ant | 82mm ant | 868Mhz | 868Mhz | 78mm ant | 915Mhz | 78mm ant | 915Mhz | 78mm ant | 915Mhz | 165mm ant | 433Mhz | 82mm ant | 868Mhz | 78mm ant | 915Mhz